# EAGLE board µECU-CAN-Adapter_Verteilte_Systeme_27_09_22 (EAGLE 7.7.0)
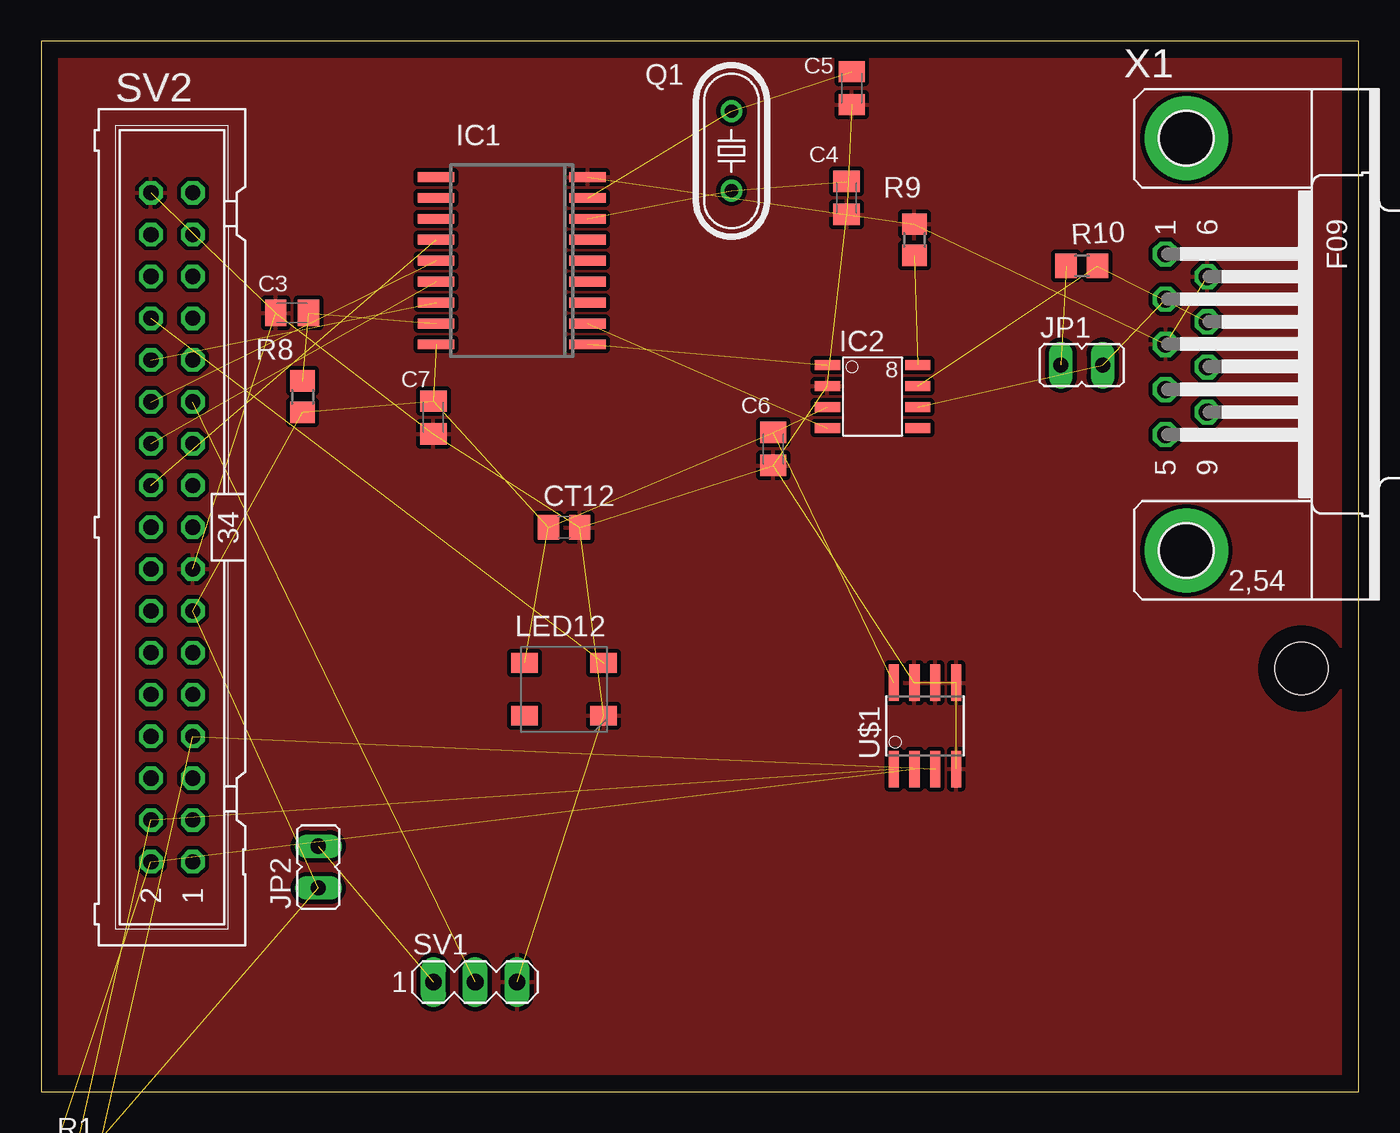
[diagram p0: board, top side]
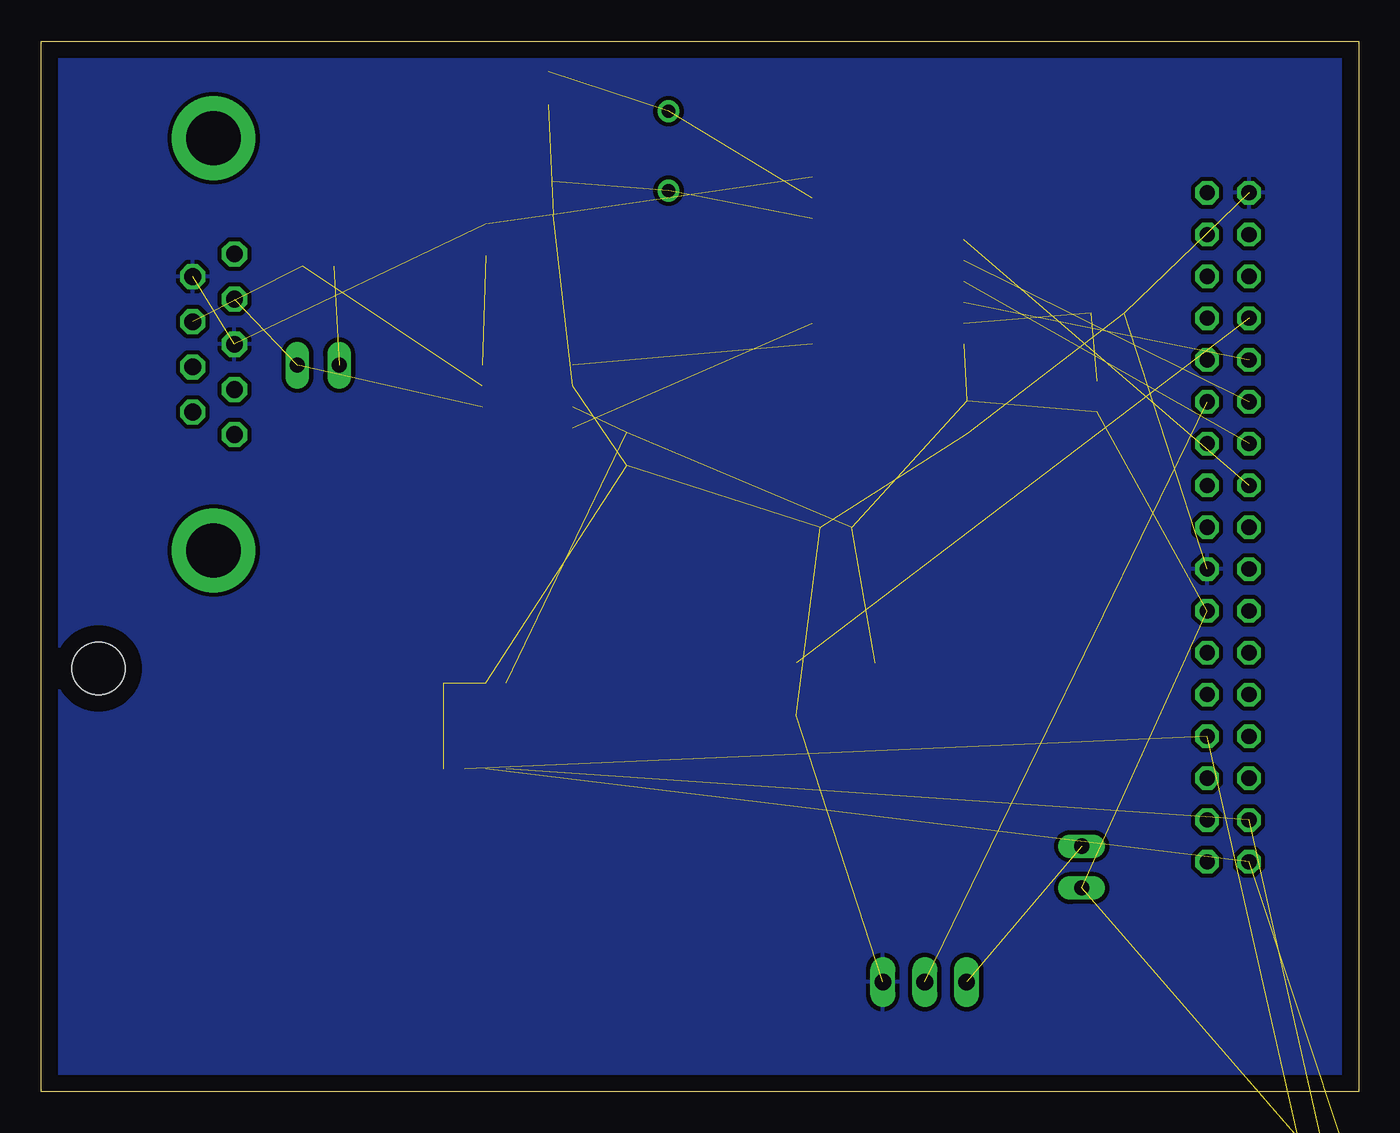
[diagram p1: board, bottom side, seen from below]

Size 80 x 63.8 mm. Coordinates in mm from the lower left corner, seen from the top.
Outline: 0,63.81 0,0 80,0 80,63.81 0,63.81
Copper layers (1*16): Top 0.035mm / dielectric 1.5mm / Bottom 0.035mm
Design rules "default *": minimum track width 6mil, minimum drill 0.35mm, track to track 8mil, track to pad 8mil, pad to pad 8mil, via to via 8mil, smd to smd 6mil, copper to edge 40mil, drill to drill 6mil, minimum pad ring 10mil, minimum via ring 8mil, stop-mask expansion 4mil, vias tented up to drill 0mil, thermal gap 10mil
Holes 3.2 mm at 76.52,25.71

## Footprints (pad centres in the part's own frame; a part is rotated, then mirrored left to right if it is on the bottom)
C0805K = smd 1.3 x 1.6: 1 -1,0; 2 1,0
C0805 = smd 1.3 x 1.5: 1 -0.95,0; 2 0.95,0
SO-18DW = smd 0.6 x 2.2: 1 -5.08,-4.6; 2 -3.81,-4.6; 3 -2.54,-4.6; 4 -1.27,-4.6; 5 0,-4.6; 6 1.27,-4.6; 7 2.54,-4.6; 8 3.81,-4.6; 9 5.08,-4.6; 10 5.08,4.6; 11 3.81,4.6; 12 2.54,4.6; 13 1.27,4.6; 14 0,4.6; 15 -1.27,4.6; 16 -2.54,4.6; 17 -3.81,4.6; 18 -5.08,4.6
SO8 = smd 0.61 x 1.524: 1 -1.27,-2.743; 2 0,-2.743; 3 1.27,-2.743; 4 2.54,-2.743; 5 2.54,2.743; 6 1.27,2.743; 7 0,2.743; 8 -1.27,2.743
JP1 = drill 0.914 long: 1 0,-1.27; 2 0,1.27
WS2812_4 = smd 1.6 x 1.2: 1 2.4,-1.6; 2 2.4,1.6; 3 -2.4,1.6; 4 -2.4,-1.6
HC49/S = drill 0.813: 1 -2.413,0; 2 2.413,0
R0805 = smd 1.3 x 1.5: 1 -0.95,0; 2 0.95,0
MA03-1 = drill 1.016 long: 1 -2.54,0; 2 0,0; 3 2.54,0
ML34 = drill 0.914 octagon: 1 -20.32,-1.27; 2 -20.32,1.27; 3 -17.78,-1.27; 4 -17.78,1.27; 5 -15.24,-1.27; 6 -15.24,1.27; 7 -12.7,-1.27; 8 -12.7,1.27; 9 -10.16,-1.27; 10 -10.16,1.27; 11 -7.62,-1.27; 12 -7.62,1.27; 13 -5.08,-1.27; 14 -5.08,1.27; 15 -2.54,-1.27; 16 -2.54,1.27; 17 0,-1.27; 18 0,1.27; 19 2.54,-1.27; 20 2.54,1.27; 21 5.08,-1.27; 22 5.08,1.27; 23 7.62,-1.27; 24 7.62,1.27; 25 10.16,-1.27; 26 10.16,1.27; 27 12.7,-1.27; 28 12.7,1.27; 29 15.24,-1.27; 30 15.24,1.27; 31 17.78,-1.27; 32 17.78,1.27; 33 20.32,-1.27; 34 20.32,1.27
SO08 = smd 0.61 x 2.21: 1 -1.905,-2.616; 2 -0.635,-2.616; 3 0.635,-2.616; 4 1.905,-2.616; 5 1.905,2.616; 6 0.635,2.616; 7 -0.635,2.616; 8 -1.905,2.616
F09HP = drill 1.016 octagon: 1 -5.486,-1.27; 2 -2.743,-1.27; 3 0,-1.27; 4 2.743,-1.27; 5 5.486,-1.27; 6 -4.115,1.27; 7 -1.372,1.27; 8 1.372,1.27; 9 4.115,1.27 | drill 3.302 pad 5.08: G1 -12.522,0; G2 12.522,0

## Placement (x,y rotation side)
C3  100nF  [C0805K]  15.24,47.29 180 top
C4  22pF  [C0805K]  48.9,54.28 270 top
C5  22pF  [C0805K]  49.21,60.95 270 top
C6  100nF  [C0805K]  44.45,39.04 270 top
C7  100nF  [C0805K]  23.81,40.95 270 top
CT12  100n  [C0805]  31.75,34.28 0 top
IC1  MCP2515  [SO-18DW]  28.57,50.47 90 top
IC2  PCA82C251  [SO8]  50.48,42.85 270 top
JP1  [JP1]  63.18,44.12 270 top
JP2  [JP1]  16.83,13.64 0 top
LED12  WS2812_4H  [WS2812_4]  31.75,24.44 0 top
Q1  16MHz  [HC49/S]  41.91,57.14 90 top
R1  10k  [R0805]  1.59,-4.14 0 top  (outside the outline)
R2  10k  [R0805]  1.59,-10.17 0 top  (outside the outline)
R3  10k  [R0805]  1.59,-16.2 0 top  (outside the outline)
R8  10k  [R0805]  15.88,42.21 270 top
R9  10k  [R0805]  53.02,51.74 270 top
R10  120  [R0805]  63.18,50.15 0 top
SV1  [MA03-1]  26.35,6.66 0 top
SV2  [ML34]  7.94,34.28 90 top
U$1  [SO08]  53.66,22.21 0 top
X1  [F09HP]  69.53,45.39 270 top

## Library data of the parts
C3-C7 CT12 R1-R3 R8-R10 = rcl
IC1 LED12 U$1 = sp2
IC2 = philips
JP1 JP2 = jumper
Q1 = crystal; OC_FARNELL: 1667008; OC_NEWARK: unknown
SV1 = con-lstb; OC_FARNELL: unknown; OC_NEWARK: unknown
SV2 = con-harting-ml; OC_FARNELL: unknown; OC_NEWARK: unknown
X1 = con-subd; OC_FARNELL: unknown; OC_NEWARK: unknown

## Nets
+5V: C6.1 C7.1 CT12.1 IC1.18 IC2.3 JP2.1 LED12.3 R1.2 R2.2 R3.2 R8.2 SV2.13 U$1.8
+12V: SV2.33
AREF: SV2.16
GND: C3.2 C4.2 C5.2 C6.2 C7.2 CT12.2 IC1.9 IC2.2 LED12.1 R9.1 SV1.3 SV2.15 SV2.34 U$1.4 U$1.5 U$1.6 U$1.7 X1.3 X1.6
N$1: SV2.14
N$2: C5.1 IC1.8 Q1.2
N$3: C4.1 IC1.7 Q1.1
N$4: C3.1 IC1.17 R8.1
N$5: IC2.8 R9.2
N$6: IC1.2 IC2.4
N$7: IC1.1 IC2.1
N$8: IC2.7 R10.2 X1.7
N$9: JP1.1 R10.1
N$10: IC2.6 JP1.2 X1.2
N$12: LED12.4
N$16: JP2.2 SV1.1
N$40: SV2.29
N$41: SV2.31
N$44: SV2.32
N$45: SV2.30
PB0: SV2.27
PB1: LED12.2 SV2.28
PB2: IC1.16 SV2.26
PB3: IC1.14 SV2.24
PB4: IC1.15 SV2.22
PB5: IC1.13 SV2.20
PB6: SV2.17
PB7: SV2.19
PC0: SV2.12
PC1: SV2.10
PC2: SV2.8
PC3: SV2.6
PC4: R2.1 SV2.4 U$1.1
PC5: R1.1 SV2.2 U$1.2
PC6: SV2.1
PD0: SV2.3
PD1: SV2.5
PD2: R3.1 SV2.7 U$1.3
PD3: SV2.9
PD4: SV2.11
PD5: SV2.21
PD6: SV1.2 SV2.23
PD7: SV2.25

## Tracks (layer width: path | path; a pad name or v marks a point on that pad's centre or on a via)
+5V  (12 unrouted)
GND  (18 unrouted)
  pour Top (isolate 0.254): 0,63.8 0,0.3 80.01,0.3 80.01,63.8
  pour Bottom (isolate 0.254): 80.01,63.8 0,63.8 0,0.3 80.01,0.3
N$2  (2 unrouted)
N$3  (2 unrouted)
N$4  (2 unrouted)
N$5  (1 unrouted)
N$6  (1 unrouted)
N$7  (1 unrouted)
N$8  (2 unrouted)
N$9  (1 unrouted)
N$10  (2 unrouted)
N$16  (1 unrouted)
PB1  (1 unrouted)
PB2  (1 unrouted)
PB3  (1 unrouted)
PB4  (1 unrouted)
PB5  (1 unrouted)
PC4  (2 unrouted)
PC5  (2 unrouted)
PD2  (2 unrouted)
PD6  (1 unrouted)